# EAGLE board bitsClassic (EAGLE 9.2.2)
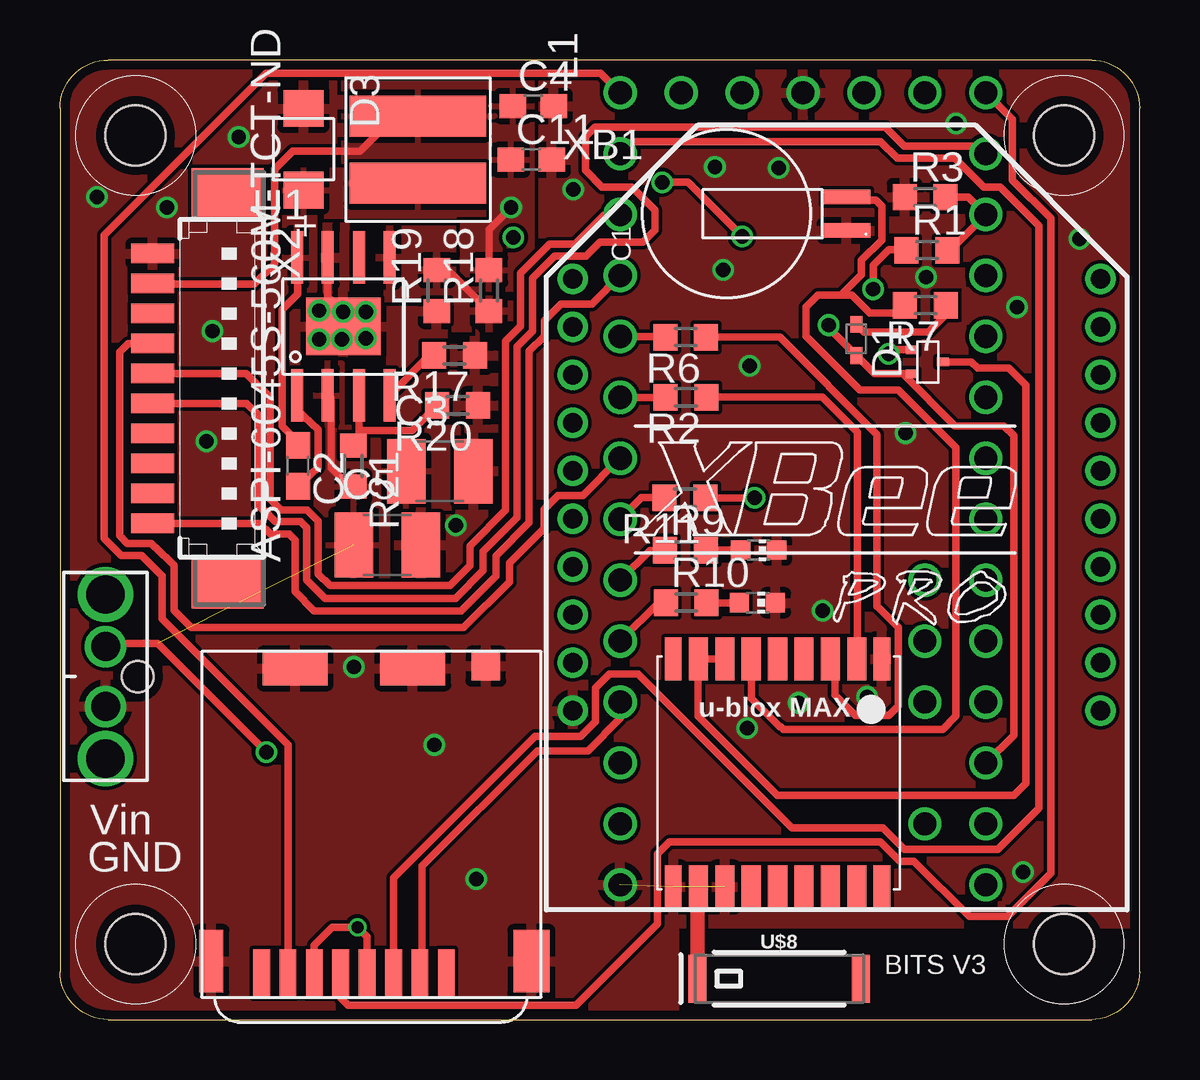
[diagram p0: board, top side]
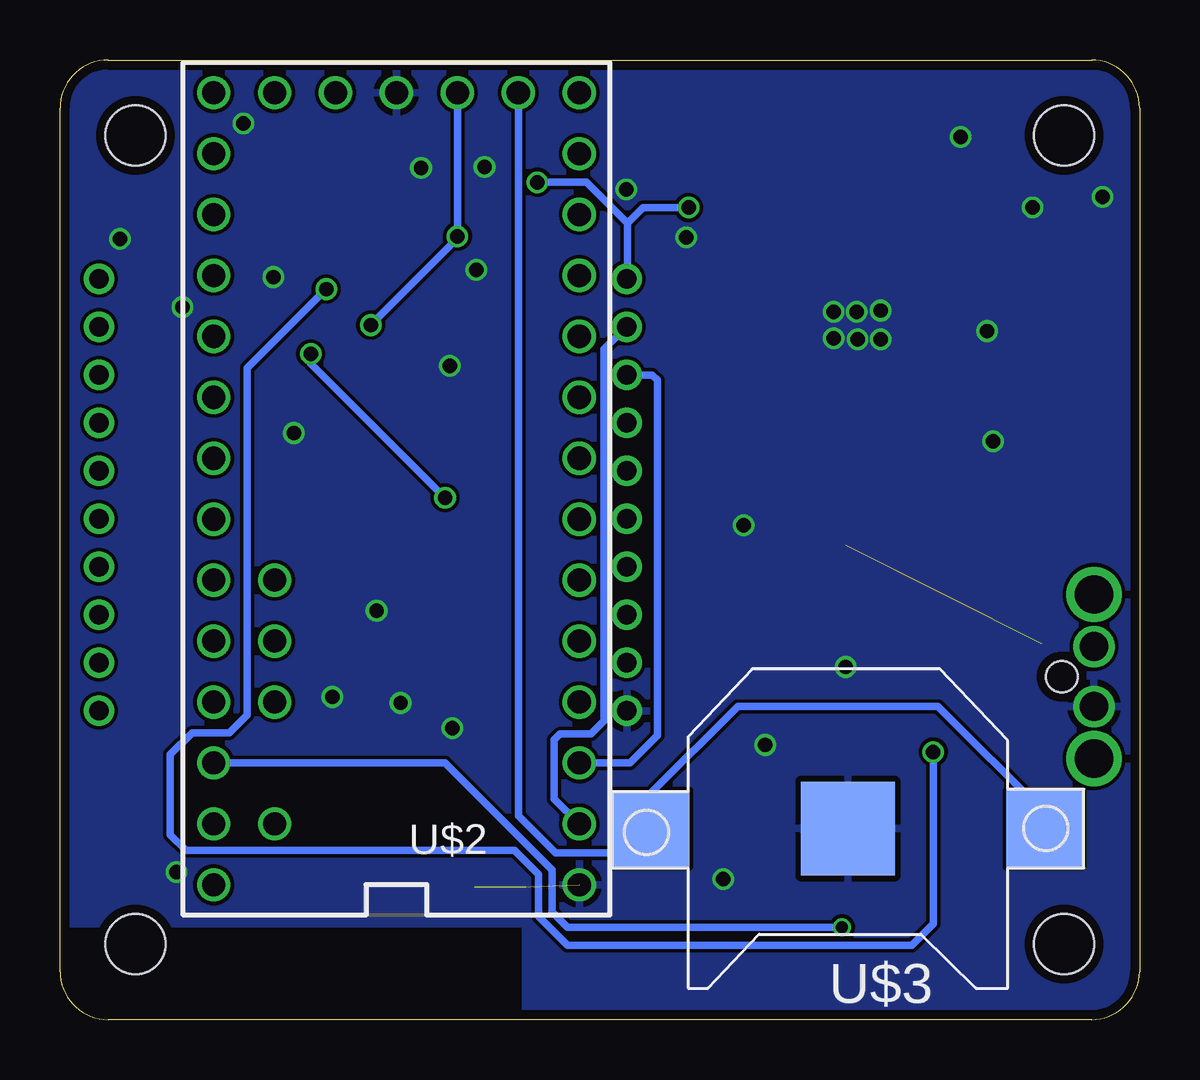
[diagram p1: board, bottom side, seen from below]

Size 45 x 40 mm. Coordinates in mm from the lower left corner, seen from the top.
Outline: 2,0 43,0 arc90 45,2 45,38 arc90 43,40 2,40 arc90 0,38 0,2 arc90 2,0
Copper layers (1*16): Top 0.035559375mm / dielectric 1.6mm / Bottom 0.035559375mm
Design rules "oshpark-2layer *": minimum track width 6mil, minimum drill 10mil, track to track 6mil, track to pad 6mil, pad to pad 6mil, via to via 6mil, smd to smd 6mil, copper to edge 15mil, drill to drill 6mil, minimum pad ring 5mil, minimum via ring 5mil, stop-mask expansion 2.5mil, vias tented up to drill 0mil, thermal gap 10mil
Holes 2.5 mm at 3.15,3.15 3.15,36.85 41.85,3.15 41.85,36.85

## Footprints (pad centres in the part's own frame; a part is rotated, then mirrored left to right if it is on the bottom)
ELNASUPERCAP = smd 0.6 x 2: 3V3 0.7,-1.5; GND -0.7,-1.5
C0603 = smd 1.1 x 1: 1 -0.85,0; 2 0.85,0
C1210 = smd 1.6 x 2.7: 1 -1.4,0; 2 1.4,0
SOD523 = smd 0.7 x 0.5: A 0.7,0; C -0.6,0
DO-214AC = smd 1.524 x 1.676: P$1 -1.702,0; P$2 1.702,0
ABRACON = smd 1.7 x 5.7: P$1 1.4,0; P$2 -1.4,0
CHIP-LED0603 = smd 0.8 x 0.8: A 0,-0.75; C 0,0.75
R0603 = smd 1 x 1.1: 1 -0.85,0; 2 0.85,0
SC-75 = smd 0.356 x 0.503: P$1 0.178,0.251; P$2 1.18,0.251; P$3 0.686,1.55
SO8 = smd 0.5 x 2.2: P$1 -1.92,-2.875; P$2 -0.65,-2.875; P$3 0.65,-2.875; P$4 1.92,-2.875; P$5 1.92,2.875; P$6 0.65,2.875; P$7 -0.65,2.875; P$8 -1.92,2.875 | smd 3.1 x 2.4: PAD 0,0
MOLEX_NANOFIT_2 = drill 1.2 pad 1.7: P$1 1.25,0; P$2 -1.25,0 | drill 1.6 pad 1.93: P$3 3.42,0; P$4 -3.42,0 | hole 1.3: 0,-1.34
TEENSY_3.0-3.2&LC_ALL_PINS = drill 0.965: 0 -7.62,13.97; 1 -7.62,11.43; 2 -7.62,8.89; 3 -7.62,6.35; 3.3V 7.62,11.43; 3.3V1 -2.54,-16.51; 4 -7.62,3.81; 5 -7.62,1.27; 6 -7.62,-1.27; 7 -7.62,-3.81; 8 -7.62,-6.35; 9 -7.62,-8.89; 10 -7.62,-11.43; 11 -7.62,-13.97; 12 -7.62,-16.51; 13 7.62,-16.51; 14/A0 7.62,-13.97; 15/A1 7.62,-11.43; 16/A2 7.62,-8.89; 17/A3 7.62,-6.35; 18/A4 7.62,-3.81; 19/A5 7.62,-1.27; 20/A6 7.62,1.27; 21/A7 7.62,3.81; 22/A8 7.62,6.35; 23/A9 7.62,8.89; A10 5.08,6.35; A11 5.08,3.81; AGND 7.62,13.97; AREF 5.08,8.89; GND -7.62,16.51; GND1 0,-16.51; PGM 2.54,-16.51; RESET/DAC 5.08,-16.51; VBAT -5.08,-16.51; VIN 7.62,16.51; VUSB 5.08,13.97
CR1220-SMD = smd 3.2 x 3.2: +$1 -8.2,0; +$2 8.2,0 | smd 3.9 x 3.9: - 0,0
MICRO_SD_HINGED = smd 0.7 x 2: CD -1.1,-13.4; CLK -4.4,-13.4; CMD -2.2,-13.4; DAT0 -6.6,-13.4; DAT1 -7.7,-13.4; DAT2 0,-13.4; VDD -3.3,-13.4; VSS -5.5,-13.4 | smd 2.7 x 1.4: CD1 -1.4,-0.7; GND3 -6.3,-0.7 | smd 1.5 x 2.6: GND1 3.55,-12.9 | smd 1.2 x 1.2: GND2 1.65,-0.6 | smd 1 x 2.6: GND4 -9.8,-12.9
MAX-M8 = smd 1.8 x 0.7: 1_GND 4.95,-4.4; 9_RESET_N 4.95,4.3; 10_GND -4.55,4.3; 18_SAFEBOOT_N -4.55,-4.4 | smd 1.8 x 0.8: 2_TXD 4.95,-3.35; 3_RXD 4.95,-2.25; 4_TIMEPULSE 4.95,-1.15; 5_EXTINT 4.95,-0.05; 6_V_BCKP 4.95,1.05; 7_VCC_IO 4.95,2.15; 8_VCC 4.95,3.25; 11_RF_IN -4.55,3.25; 12_GND -4.55,2.15; 13_LNA_EN -4.55,1.05; 14_VCC_RF -4.55,-0.05; 15_V_ANT/RESERVED -4.55,-1.15; 16_SDA -4.55,-2.25; 17_SCL -4.55,-3.35
SPARKFUN-GPS_ANT-GPS-2X7MM = smd 0.75 x 2: 1 -3.4,0; NC 3.4,0
53398-10 = smd 0.8 x 1.8: 1 5.625,-2.5; 2 4.375,-2.5; 3 3.125,-2.5; 4 1.875,-2.5; 5 0.625,-2.5; 6 -0.625,-2.5; 7 -1.875,-2.5; 8 -3.125,-2.5; 9 -4.375,-2.5; 10 -5.625,-2.5 | smd 2.1 x 3: S1 8.125,0.625; S2 -8.125,0.625
XBEE-PRO = drill 0.8 pad 1.27: 1 -11,9; 2 -11,7; 3 -11,5; 4 -11,3; 5 -11,1; 6 -11,-1; 7 -11,-3; 8 -11,-5; 9 -11,-7; 10 -11,-9; 11 11,-9; 12 11,-7; 13 11,-5; 14 11,-3; 15 11,-1; 16 11,1; 17 11,3; 18 11,5; 19 11,7; 20 11,9

## Placement (x,y rotation side)
C1  [ELNASUPERCAP]  31.29,33.59 90 top
C2  .1 uF  [C0603]  9.92,23.08 270 top
C3  10 uF  [C1210]  15.83,22.85 0 top
C4  .18 uF  [C0603]  19.73,38.07 0 top
C5  2.2 uF  [C1210]  13.64,19.78 0 top
C11  10 uF  [C0603]  19.65,35.84 0 top
D1  [SOD523]  33.19,28.38 270 top
D3  DO-214AC  [DO-214AC]  10.15,36.27 270 top
L1  ASPI-6045S-560M-TCT-ND  [ABRACON]  14.92,36.26 270 top
LED1  Red  [CHIP-LED0603]  29.12,19.57 270 top
LED2  Green  [CHIP-LED0603]  29.07,17.37 270 top
R1  18k  [R0603]  36.14,32.07 0 top
R2  22  [R0603]  26.09,25.94 180 top
R3  10k  [R0603]  36.06,34.28 0 top
R6  22  [R0603]  26.09,28.44 180 top
R7  22  [R0603]  36.08,29.77 180 top
R9  470  [R0603]  26.07,19.55 0 top
R10  470  [R0603]  26.11,17.38 0 top
R11  100  [R0603]  26.05,21.75 180 top
R17  23.3k  [R0603]  16.45,27.68 180 top
R18  45k  [R0603]  17.88,30.39 90 top
R19  13.3k  [R0603]  15.71,30.38 90 top
R20  31.6k  [R0603]  16.57,25.6 180 top
R21  190k  [R0603]  12.23,23.08 270 top
T1  SI1013  [SC-75]  35.25,28.1 270 top
U1  LMR16020  [SO8]  11.81,28.89 0 top
U$1  MOLEX_NANOFIT_2  [MOLEX_NANOFIT_2]  1.9,14.3 90 top
U$2  TEENSY_3.1-3.2_ALL_PINS  [TEENSY_3.0-3.2&LC_ALL_PINS]  30.97,22.13 180 bottom
U$3  CR1220SMT  [CR1220-SMD]  12.16,7.96 180 bottom
U$4  MICRO_SD  [MICRO_SD_HINGED]  16.1,15.33 0 top
U$7  MAX-M8  [MAX-M8]  29.87,10.08 90 top
U$8  1.575GHz  [SPARKFUN-GPS_ANT-GPS-2X7MM]  29.98,1.7 0 top
X2  53398-10  [53398-10]  6.37,26.31 270 top
XB1  XBEE-PRO  [XBEE-PRO]  32.38,21.88 0 top

## Library data of the parts
C1 = jmolterLib
C2-C5 C11 R1 R3 R9 R10 R17-R21 = resistor
D1 = diode
D3 U1 = HASP
L1 = inductors
LED1 LED2 = led
R2 R6 R7 R11 = rcl; SPICEPREFIX: R
T1 U$1 = cmdLibs
U$2 = Teensy_3_and_LC_Series_Boards_v1.4
U$3 = adafruit
U$4 = NR_connectors
U$7 = ubloxLib
U$8 = Tracksoar v2 ; PROD_ID: ANT-09087; SF_ID: GPS-09131
X2 = con-molex; MF: MOLEX; MPN: 53398-1071; OC_FARNELL: unknown; OC_NEWARK: 59J0425
XB1 = maxstream; MPN: XBP24-AWI-001; OC_FARNELL: 1337916; OC_NEWARK: 42M2667

## Nets
9_V_RESET_N: U$7.9_RESET_N
+3V3: C4.1 C11.1 D1.A L1.P$2 R18.2 T1.P$2 U$2.3.3V U$2.3.3V1 U$4.VDD U$4.VSS X2.9 XB1.1
+5V: X2.8
A: U$2.16/A2
AGND: U$2.AGND
AREF: U$2.AREF
BAT_CELL1: R1.2 R3.2 U$2.15/A1
CTS: X2.2
DIN: U$2.1 XB1.3
DOUT: U$2.0 XB1.2
FB: R18.1 R19.2 U1.P$5
GND: C1.GND C3.2 C4.2 C5.2 C11.2 D3.P$1 LED1.C LED2.C R3.1 R17.1 R19.1 R20.1 U1.P$7 U1.PAD U$1.P$2 U$2.GND U$2.GND1 U$3.- U$4.CD1 U$4.GND1 U$4.GND2 U$4.GND3 U$4.GND4 U$7.1_GND U$7.10_GND U$7.12_GND X2.10 XB1.10
GPSON: R11.2 U$2.5
IN1: C3.1 C5.1 R1.1 R21.2 U1.P$2 U$1.P$1
K: U$2.19/A5
LED1: R9.1 U$2.4
LED2: R10.1 U$2.3
MISO: U$2.12 U$4.DAT0
MOSI: U$2.11 U$4.CMD
N$1: U$7.11_RF_IN U$8.1
N$2: D1.C R7.1
N$3: R6.1 U$7.3_RXD
N$4: R2.1 U$7.2_TXD
N$5: LED2.A R10.2
N$6: LED1.A R9.2
N$7: U$2.17/A3
N$8: U$2.18/A4
N$9: R11.1 T1.P$1
N$10: U$2.A11
N$11: T1.P$3 U$7.7_VCC_IO U$7.8_VCC
N$12: U$2.20/A6
N$13: U$2.21/A7
N$29: R17.2 U1.P$4
N$31: C2.2 U1.P$1
N$34: R20.2 R21.1 U1.P$3
N$35: U$2.22/A8
N$36: U$2.23/A9
N$37: U$2.A10
NETAV: X2.4
RING: U$2.14/A0 X2.5
RTS: X2.3
RX3: R2.2 U$2.7
RXD: U$2.9 X2.1
SCK: U$2.13 U$4.CLK
SD_CS: U$2.2 U$4.CD
SLEEP: U$2.6 X2.7
SW: C2.1 D3.P$2 L1.P$1 U1.P$8
TX3: R6.2 U$2.8
TXD: U$2.10 X2.6
V_BCKP: C1.3V3 R7.2 U$7.6_V_BCKP
VBAT: U$2.VBAT U$3.+$1 U$3.+$2
VIN: U$2.VIN
VUSB: U$2.VUSB

## Tracks (layer width: path | path; a pad name or v marks a point on that pad's centre or on a via)
+3V3  (via drill 0.5, 0.6)
  Top 0.305: U$4.VSS 10.6,3.1 11.35,3.85 v12.4,3.85 12.8,3.45 U$4.VDD | T1.P$2 35.13,26.92 | v32.05,28.95 32.05,28.82 D1.A 33.95,26.92 35.13,26.92 | U$2.3.3V 39.75,11.85 39.75,24.35 39.35,24.75 37.3,24.75 35.13,26.92 | R18.2 17.88,32.93 v18.8,33.85 | v25.1,34.9 26.18,34.9 v28.43,32.65 | L1.P$2 13.96,37.66 12.5,36.2 9.7,36.2 8.95,35.45 8.95,31.5 8.1,30.65 3.91,30.65 X2.9
  Bottom 0.305: U$2.3.3V 28.95,10.7 24.5,6.25 24.5,4.5 23.85,3.85 v12.4,3.85 | U$2.3.3V1 v28.43,32.65 28.43,32.57 v32.05,28.95 | v18.8,33.85 20.7,33.85 21.35,33.2 | 21.35,33.2 21.35,30.9 XB1.1 | 21.35,33.2 23.05,34.9 v25.1,34.9
  pour Top: 11.85,40.2 19.65,40.2 19.65,30.45 16.8,30.45 16.8,33.2 18.05,33.2 18.05,35.7 11.85,35.7
BAT_CELL1
  Top 0.305: R3.2 37.87,34.28 U$2.15/A1 37.11,32.07 R1.2
DIN
  Bottom 0.305: XB1.3 20.32,26.88 20.1,26.65 20.1,11.85 21.25,10.7 U$2.1
DOUT
  Bottom 0.305: U$2.0 24.4,9.2 24.4,11.65 24.15,11.9 22.87,11.9 22.32,12.45 22.32,27.95 21.39,28.88 XB1.2
FB
  Top 0.305: R19.2 16.18,31.23 R18.1
  pour Top (rank 2): 13.3,32.95 16.8,32.95 16.8,30.4 18.95,30.4 18.95,28.8 16.4,28.8 16.4,30.05 13.3,30.05
GND  (via drill 0.6)  (2 unrouted)
  Top 0.305: U1.P$7 11.16,30.14 v11.8,29.5
  other vias: 7.45,36.8 4.45,33.85 10.8,29.55 12.75,29.5 10.8,28.35 11.75,28.35 12.75,28.4 18.9,32.6 21.4,34.6 27.3,35.55 29.95,35.5 27.65,31.25 28.75,27.25 35.25,24.45 39.9,29.7 42.5,32.55 37.35,37.35 36.1,30.95 28.65,12.15 30.8,13.2 33.65,13.45 31.8,17.05 40.15,6.15 17.35,5.85 15.6,11.45 16.5,20.6 12.25,14.7 6.1,24.1 6.35,28.7 1.55,34.3
  pour Top (rank 6): -1,41 47,41 47,4 25.6,4 25.6,-6 -1,-6
  pour Bottom (rank 6): -2,42 48,42 48,4 25.6,4 25.6,-7 -2,-7
GPSON
  Top 0.305: R11.2 24.25,21.75 U$2.5
IN1  (via drill 0.6)  (1 unrouted)
  Top 0.305: v8.6,11.15 4.07,15.68 2.03,15.68 U$1.P$1 | v33.9,30.45 33.9,31.45 34.55,32.1 35.26,32.1 R1.1 | R21.2 12.07,22.23 11.3,23 11.3,25.88 U1.P$2
  Bottom 0.305: v8.6,11.15 8.6,4 9.5,3.1 23.85,3.1 25.05,4.3 25.05,6.05 26.05,7.05 39.75,7.05 40.4,7.7 40.4,11.05 39.5,11.95 37.95,11.95 37.2,12.7 37.2,27.15 v33.9,30.45
  pour Top: 13.65,21.35 16.6,21.35 16.6,24.65 11.75,24.65 11.75,27.35 10.65,27.35 10.65,18.35 13.65,18.35
LED1
  Top 0.305: R9.1 24.59,19.55 U$2.4
LED2
  Top 0.305: R10.1 24.96,17.38 U$2.3
MISO
  Top 0.305: U$4.DAT0 9.5,11.45 4.25,16.7 4.25,18.5 3.4,19.35 2.55,19.35 1.85,20.05 1.85,32.7 8.6,39.45 22.54,39.45 U$2.12
MOSI
  Top 0.305: U$2.11 23.86,36.6 34.2,36.6 34.9,35.9 37.3,35.9 38.5,34.7 39.2,34.7 40.8,33.1 40.8,8.8 39.1,7.1 35.2,7.1 34.3,8 30.5,8 24.1,14.4 22.9,14.4 22.32,13.82 22.32,12.42 21.7,11.8 19.8,11.8 13.9,5.9 U$4.CMD
N$1
  Top 0.61: U$8.1 26.58,5.49 U$7.11_RF_IN
N$2
  Top 0.305: D1.C 33.52,28.65 36.2,28.65 36.93,29.38 R7.1
N$3
  Top 0.305: R6.1 30.01,28.44 34.06,24.39 34.06,17.22 34.08,17.22 34.52,16.78 34.91,16.39 34.95,16.35 34.95,13.07 34.56,12.68 33.16,12.68 32.31,13.53 32.31,14.83 U$7.3_RXD
N$4
  Top 0.305: R2.1 31.77,25.94 33.23,24.48 U$7.2_TXD
N$5
  Top 0.305: LED2.A R10.2
N$6
  Top 0.305: LED1.A 26.94,19.57 R9.2
N$9  (via drill 0.6)
  Top 0.305: T1.P$1 34.72,27.92 v34.55,27.75 | v28.95,21.75 R11.1
  Bottom 0.305: v34.55,27.75 34.55,27.35 v28.95,21.75
N$11
  Top 0.305: U$7.7_VCC_IO U$7.8_VCC 26.6,15.01 26.6,12.65 29.9,9.35 39.75,9.35 40.25,9.85 40.25,26.45 39.55,27.15 38.25,27.15 37.98,27.42 T1.P$3
N$29
  Top 0.305: R17.2 15.39,27.68 U1.P$4
N$31
  Top 0.305: U1.P$1 9.89,25.41 10.75,24.6 10.75,23.02 C2.2
N$34
  Top 0.305: R21.1 12.46,24.16 12.46,24.55 | 12.46,24.55 U1.P$3 | R20.2 14.67,24.55 12.46,24.55
RING
  Top 0.305: X2.5 7.78,25.69 8.25,25.22 8.25,21.45 8.47,21.23 8.5,21.23 8.97,20.76 10.04,20.76 10.28,20.52 10.28,18.33 11.05,17.56 16.48,17.56 17.64,18.72 17.64,19.51 19.05,20.92 19.05,28.05 19.7,28.7 19.7,30.9 20.62,31.82 21.92,31.82 22.51,32.41 24.31,32.41 24.8,32.9 24.8,33.73 24.81,33.74 23.85,34.7 22.6,34.7 21.9,35.4 21.9,36.8 22.3,37.2 34.4,37.2 35.2,36.4 38.29,36.4 U$2.14/A0
RX3
  Top 0.305: U$2.7 R2.2
RXD
  Top 0.305: X2.1 8.32,20.69 8.78,20.23 9.56,20.23 9.8,19.99 9.8,17.84 10.6,17.04 16.72,17.04 18.17,18.49 18.17,19.32 19.56,20.71 19.56,27.86 20.2,28.5 20.2,29.14 20.89,29.83 22.17,29.83 U$2.9
SCK
  Top 0.305: U$4.CLK 11.7,0.9 12,0.6 21.5,0.6 24.9,4 24.9,6.9 25.4,7.4 34.2,7.4 35,6.6 35.6,6.6 37.9,4.3 39.5,4.3 41.3,6.1 41.3,33.4 39.7,35 39.7,37.53 U$2.13
SD_CS
  Top 0.305: U$4.CD 15.1,2.03 15.1,6.4 19.9,11.2 22,11.2 23.35,12.55 U$2.2
SLEEP
  Top 0.305: X2.7 2.84,28.19 2.48,27.83 2.48,20.18 2.81,19.85 3.8,19.85 3.97,19.68 3.99,19.68 4.75,18.92 4.75,17.05 5.46,16.34 16.83,16.34 18.74,18.25 18.74,19.04 20.17,20.47 20.17,21.26 20.76,21.85 21.81,21.85 U$2.6
SW
  Top 0.305: C2.1 9.92,24.08 9.25,24.75 9.25,29.6 9.9,30.25 9.9,31.76 U1.P$8
  pour Top (rank 2): 9.2,35.4 17.65,35.4 17.65,33.5 10.6,33.5 10.6,30.4 9.2,30.4
TX3
  Top 0.305: U$2.8 25.2,28.48 R6.2
TXD
  Top 0.305: X2.6 7.75,26.94 8.75,25.94 8.75,21.7 9.21,21.24 10.31,21.24 10.77,20.78 10.77,18.58 11.25,18.1 16.27,18.1 17.1,18.93 17.1,19.75 18.58,21.23 18.58,28.28 19.2,28.9 19.2,31.12 20.4,32.32 21.47,32.32 22.71,33.56 U$2.10
V_BCKP
  Top 0.305: U$7.6_V_BCKP 28.82,13.38 30,12.2 30.05,12.2 30.15,12.1 36.8,12.1 37.35,12.65 37.35,23.85 34.95,26.25 33.35,26.25 31.1,28.5 31.1,29.7 31.6,30.2 32.55,30.2 | 32.55,30.2 33,30.2 33.75,29.45 34.9,29.45 R7.2 | C1.3V3 32.91,34.29 33.05,34.15 34,34.15 34.25,33.9 34.25,32.5 33.4,31.65 33.4,31.05 32.55,30.2
VBAT
  Bottom 0.305: 20.59,7.96 21.6,6.95 24.35,6.95 25.89,8.49 U$2.VBAT | 20.59,7.96 U$3.+$2 | U$3.+$1 3.96,8.61 8.4,13.05 16.75,13.05 20.4,9.4 20.4,8.15 20.59,7.96

## Text on the board
tPlace: Vin | GND | BITS V3